# EAGLE board PCBv1 (EAGLE 8.6.0)
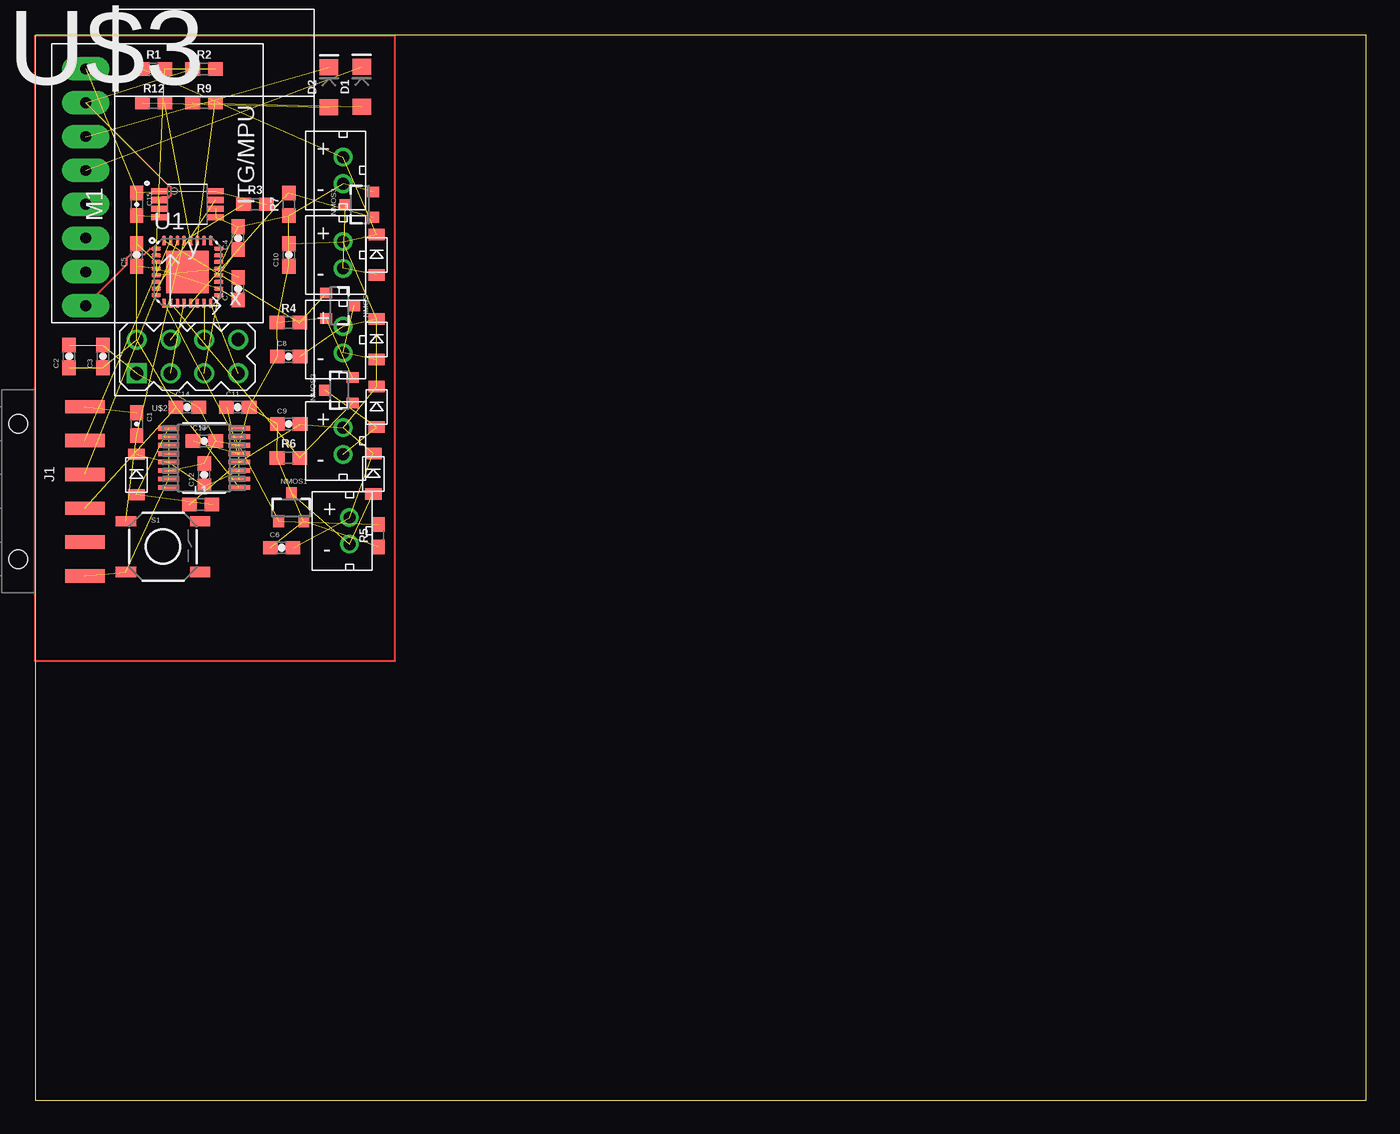
[diagram p0: board, top side]

Size 100 x 80 mm. Coordinates in mm from the lower left corner, seen from the top.
Outline: 0,0 100,0 100,80 0,80 0,0
Copper layers (1*16): Top 0.035mm / dielectric 1.5mm / Bottom 0.035mm
Design rules "default": minimum track width 6mil, minimum drill 0.35mm, track to track 6mil, track to pad 6mil, pad to pad 6mil, via to via 6mil, smd to smd 6mil, copper to edge 40mil, drill to drill 6mil, minimum pad ring 10mil, minimum via ring 8mil, stop-mask expansion 4mil, vias tented up to drill 0mil, thermal gap 10mil

## Footprints (pad centres in the part's own frame; a part is rotated, then mirrored left to right if it is on the bottom)
0603-CAP = smd 1.1 x 1: 1 -0.85,0; 2 0.85,0
LED-1206 = smd 1.2 x 1.4: A -1.5,0; C 1.5,0
MINI2-F3-B = smd 1.22 x 0.85: NEG 0,1.55; POS 0,-1.5
FTDI_DEVICE_RA_SMT = smd 1 x 3: 1 -6.35,5; 2 -3.81,5; 3 -1.27,5; 4 1.27,5; 5 3.81,5; 6 6.35,5 | hole 1.4: -5.08,0; 5.08,0
0603 = smd 1.1 x 1: 1 -0.85,0; 2 0.85,0
WIRELESS-NRF24L01 = drill 1 square: 1 -12.7,6.35 | drill 1: 2 -10.16,6.35; 3 -12.7,3.81; 4 -10.16,3.81; 5 -12.7,1.27; 6 -10.16,1.27; 7 -12.7,-1.27; 8 -10.16,-1.27
JST_CONNECTOR_FEMALE = drill 0.889: + 0,1; - 0,-1
SOT23-3 = smd 0.8 x 0.9: 1 -0.95,-1; 2 0.95,-1; 3 0,1.1
TACTILE-SWITCH-SMD = smd 1.524 x 0.762: 1 -2.794,1.905; 2 2.794,1.905; 3 -2.794,-1.905; 4 2.794,-1.905
MLF32-PAD = smd 0.7 x 0.3: 1 -2.35,1.75; 2 -2.35,1.25; 3 -2.35,0.75; 4 -2.35,0.25; 5 -2.35,-0.25; 6 -2.35,-0.75; 7 -2.35,-1.25; 8 -2.35,-1.75; 17 2.35,-1.75; 18 2.35,-1.25; 19 2.35,-0.75; 20 2.35,-0.25; 21 2.35,0.25; 22 2.35,0.75; 23 2.35,1.25; 24 2.35,1.75 | smd 0.3 x 0.7: 9 -1.75,-2.35; 10 -1.25,-2.35; 11 -0.75,-2.35; 12 -0.25,-2.35; 13 0.25,-2.35; 14 0.75,-2.35; 15 1.25,-2.35; 16 1.75,-2.35; 25 1.75,2.35; 26 1.25,2.35; 27 0.75,2.35; 28 0.25,2.35; 29 -0.25,2.35; 30 -0.75,2.35; 31 -1.25,2.35; 32 -1.75,2.35 | smd 3.2 x 3.2: PAD 0,0
GY-521 = drill 0.8 pad 1.778 long: ADO -8.89,-6.35; GND -8.89,6.35; INT -8.89,-8.89; SCL -8.89,3.81; SDA -8.89,1.27; VCC -8.89,8.89; XCL -8.89,-3.81; XDA -8.89,-1.27
21-0055H_16 = smd 1.6 x 0.356: 1 -2.654,2.223; 2 -2.654,1.587; 3 -2.654,0.953; 4 -2.654,0.318; 5 -2.654,-0.318; 6 -2.654,-0.953; 7 -2.654,-1.587; 8 -2.654,-2.223; 9 2.654,-2.223; 10 2.654,-1.587; 11 2.654,-0.953; 12 2.654,-0.318; 13 2.654,0.318; 14 2.654,0.953; 15 2.654,1.587; 16 2.654,2.223
SOP65P490X110-8N = smd 1.25 x 0.46: 1 -2.11,0.975; 2 -2.11,0.325; 3 -2.11,-0.325; 4 -2.11,-0.975; 5 2.11,-0.975; 6 2.11,-0.325; 7 2.11,0.325; 8 2.11,0.975

## Placement (x,y rotation side)
C1  100nF  [0603-CAP]  7.62,50.8 270 top
C2  10uF  [0603-CAP]  2.54,55.88 90 top
C3  100nF  [0603-CAP]  5.08,55.88 90 top
C4  100nF  [0603-CAP]  15.24,64.77 90 top
C5  100nF  [0603-CAP]  7.62,63.5 90 top
C6  100uF  [0603-CAP]  18.5,41.51 0 top
C7  100nF  [0603-CAP]  15.24,60.96 90 top
C8  100uF  [0603-CAP]  19.05,55.88 0 top
C9  100uF  [0603-CAP]  19.05,50.8 0 top
C10  100uF  [0603-CAP]  19.05,63.5 90 top
C11  100uF  [0603-CAP]  15.21,52.07 0 top
C12  100uF  [0603-CAP]  12.7,46.99 90 top
C13  0.1uF  [0603-CAP]  12.7,49.53 0 top
C14  4.7uF  [0603-CAP]  11.43,52.07 0 top
C15  100nF  [0603-CAP]  7.62,67.31 270 top
D1  Yellow  [LED-1206]  24.53,76.13 90 top
D2  Yellow  [LED-1206]  22.07,76.1 90 top
DIODE  DB2W40300L  [MINI2-F3-B]  25.64,57.15 0 top
DIODE1  DB2W40300L  [MINI2-F3-B]  25.39,47.05 0 top
DIODE2  DB2W40300L  [MINI2-F3-B]  25.64,52.07 0 top
DIODE3  DB2W40300L  [MINI2-F3-B]  25.64,63.5 0 top
DIODE4  DB2W40300L  [MINI2-F3-B]  7.59,46.99 0 top
J1  FTDI_DEVICERA_SMT  [FTDI_DEVICE_RA_SMT]  -1.27,45.75 270 top
L1  10uH  [0603]  12.43,44.75 0 top
M1  WIRELESS-NRF24L01  [WIRELESS-NRF24L01]  13.97,67.31 90 top
MOTOR  JST_CONNECTOR_FEMALE  [JST_CONNECTOR_FEMALE]  23.13,57.15 0 top
MOTOR1  JST_CONNECTOR_FEMALE  [JST_CONNECTOR_FEMALE]  23.61,42.78 0 top
MOTOR2  JST_CONNECTOR_FEMALE  [JST_CONNECTOR_FEMALE]  23.13,49.53 0 top
MOTOR3  JST_CONNECTOR_FEMALE  [JST_CONNECTOR_FEMALE]  23.13,63.5 0 top
NMOS  N-CHANNEL-MOSFET-IRLML6244TRPBF  [SOT23-3]  22.86,59.69 270 top
NMOS1  N-CHANNEL-MOSFET-IRLML6244TRPBF  [SOT23-3]  19.23,44.51 0 top
NMOS2  N-CHANNEL-MOSFET-IRLML6244TRPBF  [SOT23-3]  22.86,53.34 90 top
NMOS3  N-CHANNEL-MOSFET-IRLML6244TRPBF  [SOT23-3]  24.4,67.28 90 top
R1  2.2k  [0603]  8.89,77.47 0 top
R2  2.2k  [0603]  12.67,77.47 0 top
R3  10k  [0603]  16.51,67.31 0 top
R4  10k  [0603]  19.02,58.42 0 top
R5  10k  [0603]  25.76,42.42 90 top
R6  10k  [0603]  19.02,48.26 0 top
R7  10k  [0603]  19.05,67.31 90 top
R9  1k  [0603]  12.67,74.93 0 top
R12  1k  [0603]  8.89,74.93 0 top
S1  SWITCH-MOMENTARY-2SMD  [TACTILE-SWITCH-SMD]  9.59,41.59 0 top
U1  3.3V  [MLF32-PAD]  11.43,62.23 0 top
U2  GY-521MPU6050  [GY-521]  12.67,68.58 0 top
U$1  JST_CONNECTOR_FEMALE  [JST_CONNECTOR_FEMALE]  23.13,69.85 0 top
U$2  MAX1672'MAX1672'  [21-0055H_16]  12.67,48.26 0 top
U$3  LTC6930CMS8-8.19LTC6930CMS8-8.19  [SOP65P490X110-8N]  11.43,67.31 0 top

## Library data of the parts
C1 C15 = SparkFun-Capacitors; PROD_ID: CAP-00810
C2-C14 = SparkFun-Passives
D1 D2 = SparkFun-LED; PROD_ID: DIO-09909
DIODE DIODE1-DIODE4 M1 MOTOR MOTOR1-MOTOR3 U2 U$1 = quad
J1 = quad; PROD_ID: CONN-08971
L1 = SparkFun-Coils; PROD_ID: NDUC-07874
NMOS NMOS1-NMOS3 = quad; DATASHEET: http://www.mouser.com/ds/2/196/irlml6244pbf-936666.pdf; MOUSER: 942-IRLML6244TRPBF; URL: http://www.mouser.com/Search/ProductDetail.aspx?R=IRLML6244TRPBFvirtualkey57370000virtualkey942-IRLML6244TRPBF
R1-R7 R9 R12 = SparkFun-Resistors; PROD_ID: RES-08272
S1 = quad; PROD_ID: SWCH-08247
U1 = SparkFun-DigitalIC
U$2 = voltreg
U$3 = LTC6390

## Nets
BATTERY+: C6.2 C8.2 C9.2 C10.2 C11.1 DIODE1.NEG DIODE2.NEG DIODE3.NEG DIODE.NEG L1.1 MOTOR1.+ MOTOR2.+ MOTOR3.+ MOTOR.+ R1.1 U$1.+ U$2.12
FTDI-RX: J1.3 U1.30
FTDI-TX: J1.2 U1.31
GND: C2.2 C3.2 C4.2 C5.2 C6.1 C7.2 C8.1 C9.1 C10.1 C11.2 C12.2 C13.2 C14.2 C15.2 J1.6 M1.1 NMOS1.2 NMOS2.2 NMOS3.2 NMOS.2 R2.1 R4.1 R5.1 R6.1 R7.1 S1.3 U1.3 U1.5 U1.21 U1.PAD U2.GND U$1.- U$2.2 U$2.6 U$2.7 U$2.10 U$2.14 U$3.2 U$3.3 U$3.4 U$3.5 U$3.6
IMU-INT: U1.1 U2.INT
IMU-SCL: D2.C U2.SCL
IMU-SDA: D1.C U2.SDA
MEASURE_PIN: R1.2 R2.2 U1.2
MOTOR1: NMOS.1 R4.2 U1.32
MOTOR2: NMOS1.1 R5.2 U1.9
MOTOR3: NMOS2.1 R6.2 U1.10
MOTOR4: NMOS3.1 R7.2 U1.13
N$1: DIODE4.POS L1.2 U$2.1
N$2: C4.1 U1.20
N$3: R9.2 U1.27
N$4: DIODE1.POS MOTOR1.- NMOS1.3
N$5: DIODE2.POS MOTOR2.- NMOS2.3
N$6: DIODE.POS MOTOR.- NMOS.3
N$7: DIODE3.POS MOTOR3.- NMOS3.3
N$8: D1.A R9.1
N$9: D2.A R12.1
N$10: R12.2 U1.28
N$13: C1.1 J1.1
OSC1: U1.7 U$3.7
RESET: C1.2 R3.1 S1.1 U1.29
RF-CE: M1.3 U1.12
RF-CSN: M1.4 U1.14
RF-MISO: M1.7 U1.16
RF-MOSI: M1.6 U1.15
RF-SCK: M1.5 U1.17
VCC: C2.1 C3.1 C5.1 C7.1 C14.1 C15.1 J1.4 M1.2 R3.2 U1.4 U1.18 U2.VCC U$2.9 U$3.1 U$3.8
VR-PS: C12.1 DIODE4.NEG U$2.5 U$2.11
VR-REF: C13.1 U$2.13

## Tracks (layer width: path | path; a pad name or v marks a point on that pad's centre or on a via)
BATTERY+  (16 unrouted)
FTDI-RX  (1 unrouted)
FTDI-TX  (1 unrouted)
GND  (41 unrouted)
  Top 0.152: 9.97,68.74 10.04,68.74 10.17,68.61 10.17,67.96 10.04,67.83 9.51,67.83 U$3.2
IMU-INT
  Top 0.152: U2.INT 6.89,62.8 6.89,63.3 7.17,63.57 8.21,63.57 8.62,63.98 U1.1
IMU-SCL  (1 unrouted)
IMU-SDA  (1 unrouted)
MEASURE_PIN  (2 unrouted)
MOTOR1  (2 unrouted)
MOTOR2  (2 unrouted)
MOTOR3  (2 unrouted)
MOTOR4  (2 unrouted)
N$1  (2 unrouted)
N$2  (1 unrouted)
N$3  (1 unrouted)
N$4  (2 unrouted)
N$5  (2 unrouted)
N$6  (2 unrouted)
N$7  (2 unrouted)
N$8  (1 unrouted)
N$9  (1 unrouted)
N$10  (1 unrouted)
N$11
  Top 0.152: 27,80 27,33 0,33 0,80 27,80
N$13  (1 unrouted)
OSC1  (1 unrouted)
RESET  (3 unrouted)
RF-CE  (1 unrouted)
RF-CSN  (1 unrouted)
RF-MISO  (1 unrouted)
RF-MOSI  (1 unrouted)
RF-SCK  (1 unrouted)
VCC  (14 unrouted)
VR-PS  (3 unrouted)
VR-REF  (1 unrouted)